# Altium PCB mosfet.PcbDoc
Units mil, origin at the board's own origin, x right, y up, seen from the top; angles counter-clockwise.
Board outline 6000 x 4000 mil, 2 copper layers (Top Layer, Bottom Layer); 35 components, 26 nets, 100 pads, 0 vias.
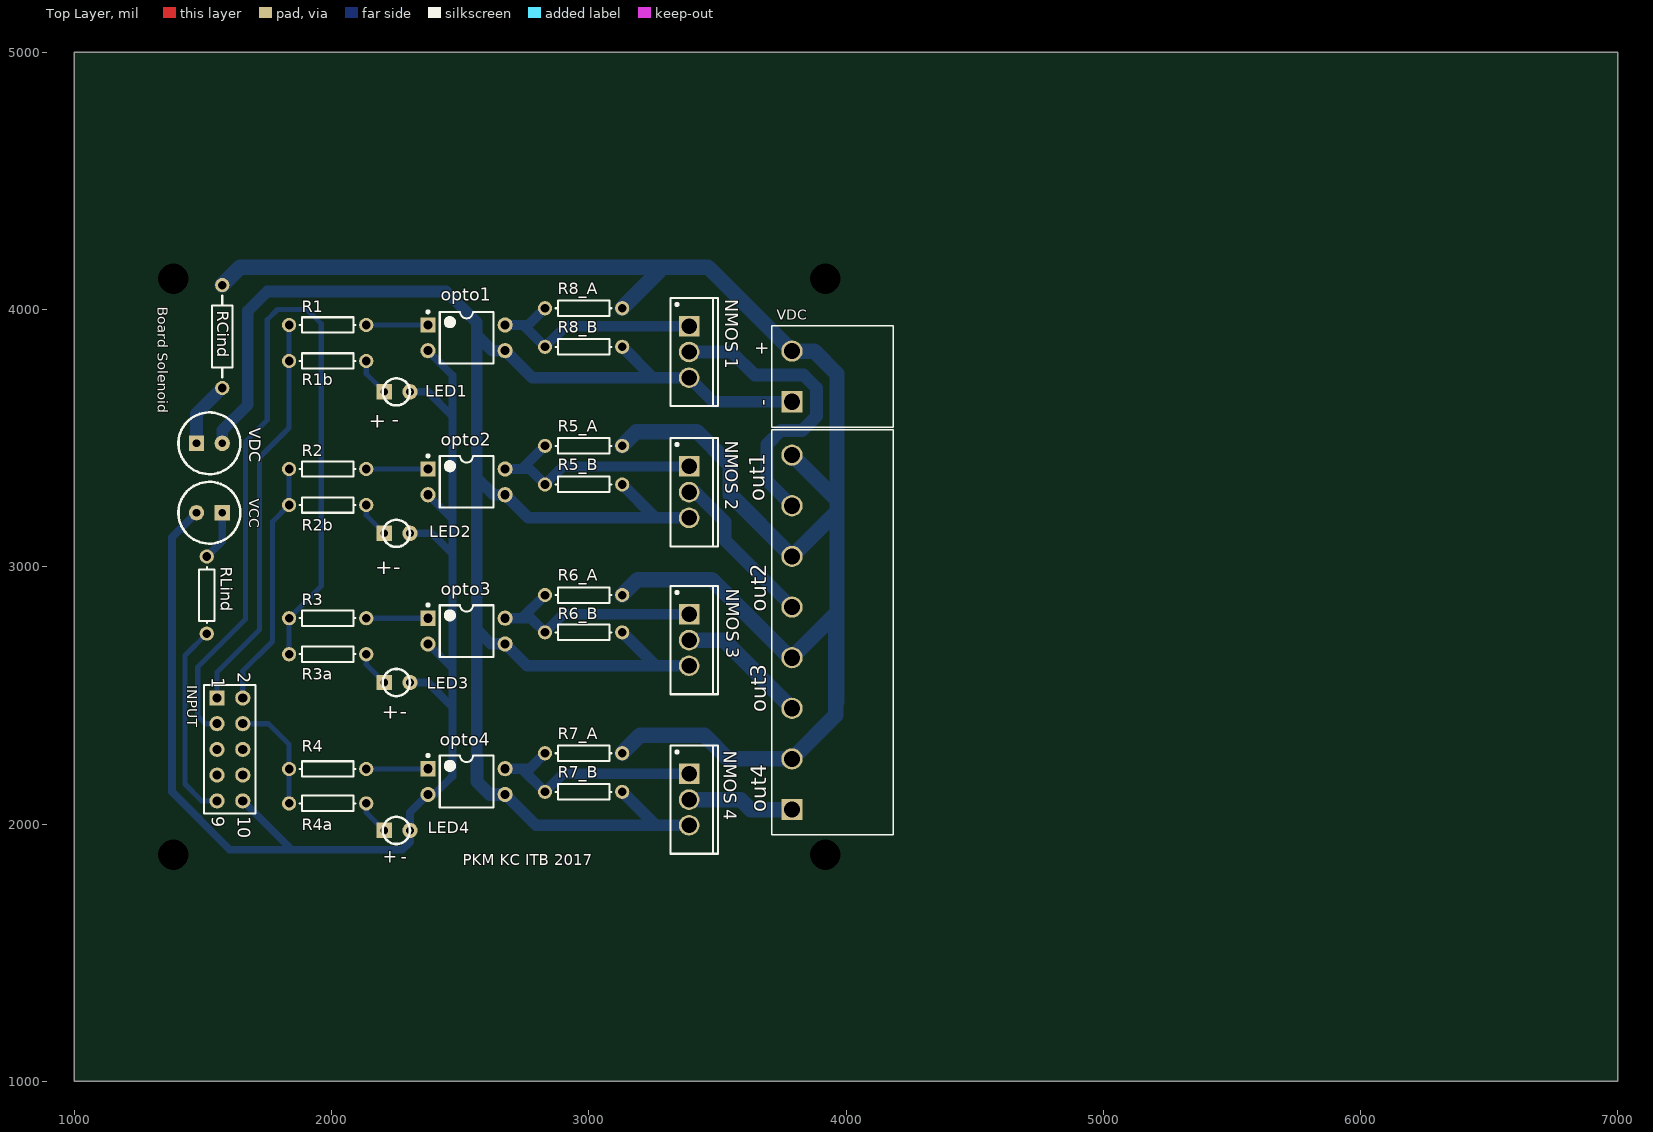
[diagram p0: Top Layer view]
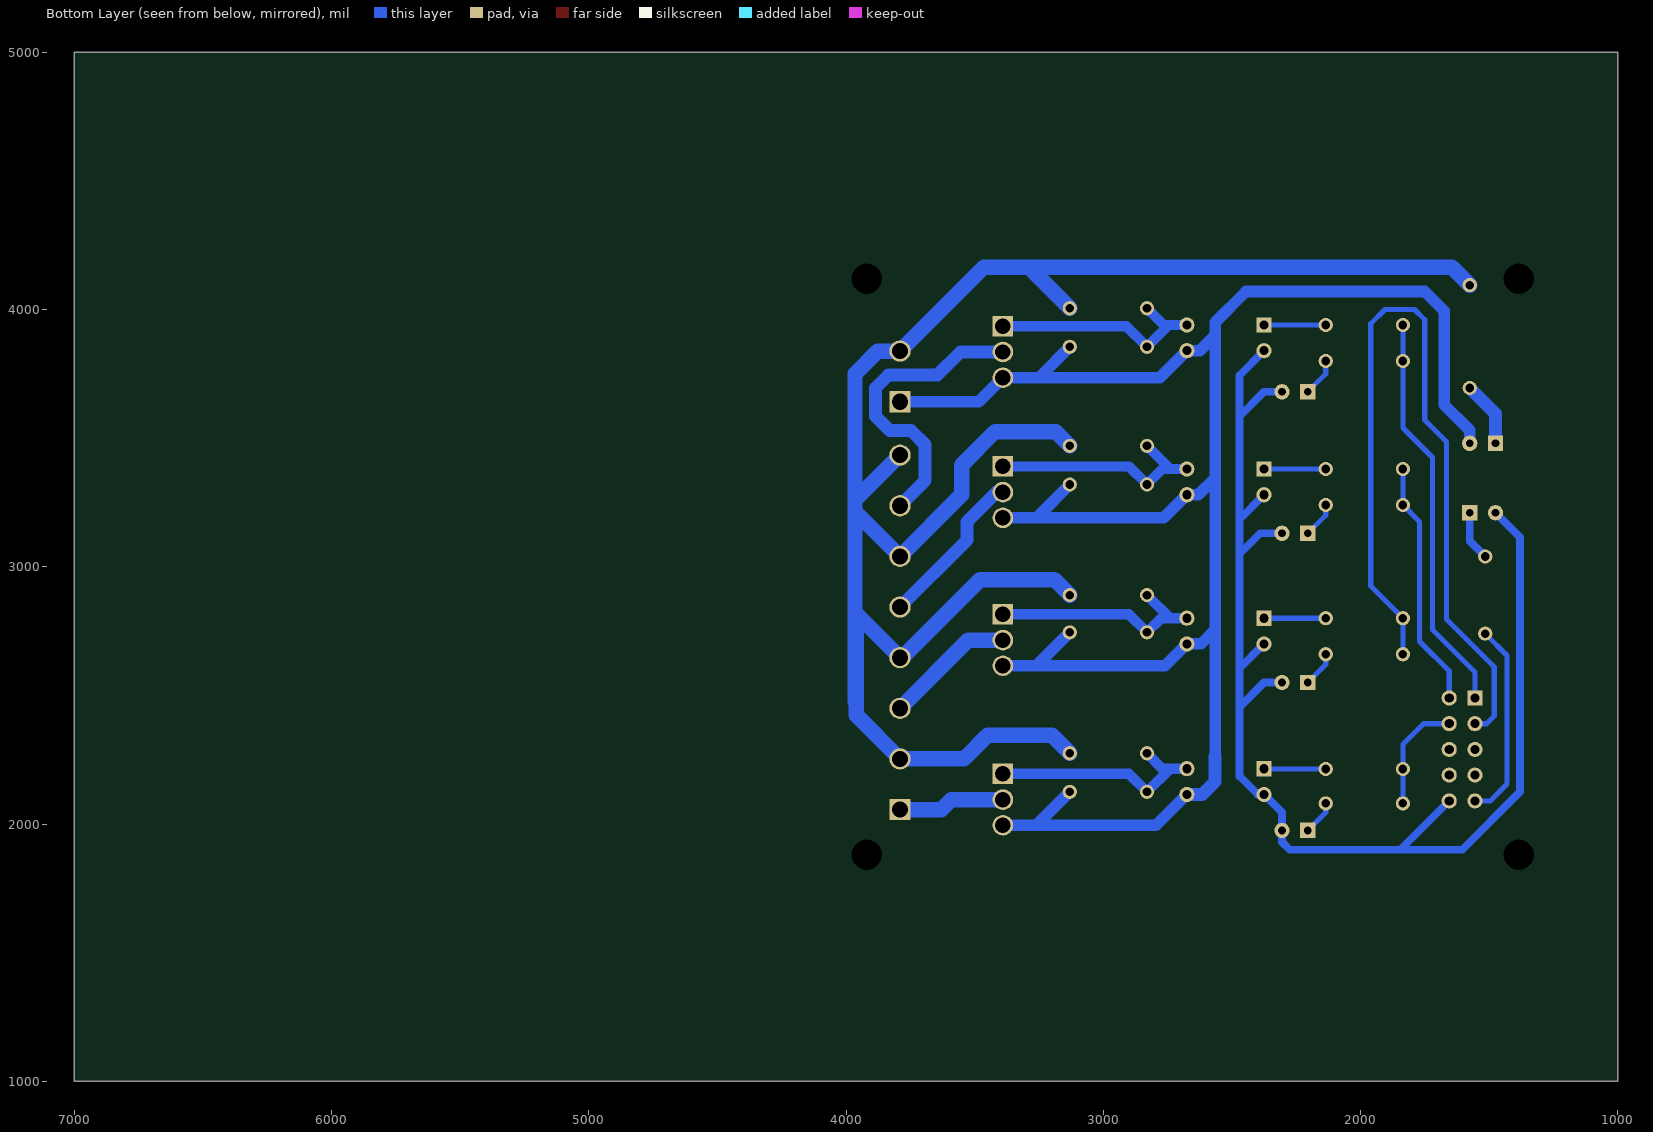
[diagram p1: Bottom Layer view, seen from below]

## Layer stack, top to bottom
Top Solder: solder mask 0.4, Solder Resist, Dk 3.5
Top Layer: signal copper 1.4
Dielectric1: dielectric 12.6, FR-4, Dk 4.8
Bottom Layer: signal copper 1.4
Bottom Solder: solder mask 0.4, Solder Resist, Dk 3.5

## Board outline
1000,1000 7000,1000 7000,5000 1000,5000

## Design rules (kind name [scope] priority, off if disabled: settings)
Clearance Clearance_3 [InNamedPolygon('ground1')] p1: gap=40
Clearance Clearance_2 [InNamedPolygon('ground2')] p2: gap=40
Clearance Clearance_1 [InNamedPolygon('ground2')] p3: gap=20
Clearance [All] p4: gap=20
PolygonConnect [All] p1: connectstyle=Relief reliefconductorwidth=10 reliefentries=4 polygonreliefangle="90 Angle" airgapwidth=10
RoomDefinition mosfet [InComponentClass('mosfet')] p1: confinementstyle=ConfineIn formatcopy=TRUE lockcomponents=FALSE outline 1285,1780 4025,1780 4025,4240 1285,4240
RoutingVias [All] p1: holewidth=28 width=50 viastyle="Through Hole" minholewidth=28 minwidth=50 maxholewidth=28 maxwidth=50
SilkToSolderMaskClearance SilkscreenOverComponentPads [IsPad] p1: minsilkscreentomaskgap=10 clearancetoexposedcopper=TRUE
SolderMaskExpansion [All] p1: expansion=4
Width [All] p1: maxlimit=100 minlimit=10 preferedwidth=10
29 further rules are at their usual default settings.

## Classes and differential pairs
component class mosfet: LED1 LED2 LED3 LED4 "NMOS 1" "NMOS 2" "NMOS 3" "NMOS 4" opto1 opto2 opto3 opto4 out1 R1 R1b R2 R2b R3 R3a R4 R4a R5_A R5_B R6_A R6_B R7_A R7_B R8_A R8_B RCind RLind VDC

## Components (designator, comment, footprint, x,y, rotation, side; value= is the part's Value field where it differs from the comment)
INPUT "Comment" HDR2X5 1555,2490 r270 top
LED1 "LED kecil" "LED kecil" 2305,3780 r0 top
LED2 "LED kecil" "LED kecil" 2305,3230 r0 top
LED3 "LED kecil" "LED kecil" 2305,2650 r0 top
LED4 "LED kecil" "LED kecil" 2305,2075 r0 top
"NMOS 1" "NMOS-2" SFM-T3/A4.7V#1 3390,3835 r270 top
"NMOS 2" "NMOS-2" SFM-T3/A4.7V#1 3390,3290 r270 top
"NMOS 3" "NMOS-2" SFM-T3/A4.7V#2 3390,2715 r270 top
"NMOS 4" "NMOS-2" SFM-T3/A4.7V#1 3390,2095 r270 top
opto1 "Optoisolator1" DIP-4 2525,3890 r0 top (schematic designator optocoupler1)
opto2 "Optoisolator1" DIP-4 2525,3330 r0 top (schematic designator optocoupler2)
opto3 "Optoisolator1" DIP-4 2525,2750 r0 top (schematic designator optocoupler3)
opto4 "Optoisolator1" DIP-4 2525,2165 r0 top (schematic designator optocoupler4)
out1 "691312710008" 691312710008 3790,2745 r90 top (schematic designator out)
R1 "Res1" AXIAL-0.3 1985,3940 r0 top
R1b "Res1" AXIAL-0.3 1985,3800 r180 top
R2 "Res1" AXIAL-0.3 1985,3380 r0 top
R2b "Res1" AXIAL-0.3 1985,3240 r180 top
R3 "Res1" AXIAL-0.3 1985,2800 r0 top
R3a "Res1" AXIAL-0.3 1985,2660 r180 top
R4 "Res1" AXIAL-0.3 1985,2213.98 r0 top
R4a "Res1" AXIAL-0.3 1985,2080 r180 top
R5_A "Res1" AXIAL-0.3 2980,3470 r0 top
R5_B "Res1" AXIAL-0.3 2980,3320 r180 top
R6_A "Res1" AXIAL-0.3 2980,2890 r0 top
R6_B "Res1" AXIAL-0.3 2980,2745 r180 top
R7_A "Res1" AXIAL-0.3 2980,2275 r0 top
R7_B "Res1" AXIAL-0.3 2980,2125 r180 top
R8_A "Res1" AXIAL-0.3 2980,4005 r0 top
R8_B "Res1" AXIAL-0.3 2980,3855 r180 top
RCind "Res2" AXIAL-0.4 1575.13,3895 r90 top
RLind "Res1" AXIAL-0.3 1515,2890 r270 top
VCC "Comment" "LED sedang" 1375,3210 r180 top
VDC "LED sedang" "LED sedang" 1675.13,3480 r0 top (schematic designator COILIND)
VDC "Terminal 2 pin" 691312710002 3790,3740 r90 top (schematic designator Vsumber)

## Footprints (in the part's own frame and the unit in brackets; to place one, negate y for a bottom-side part, rotate by r counter-clockwise, add the part's x,y. Pads: shape width x height; smd on the part's side, far side on the other; paste and mask are expansions set on the pad)
691312710002 [mm] "5.00mm - Open Horizhontal PCB Header - 02p"
  rect 2.1x2.1 hole 1.6: 1(-2.5,0)
  round 2.1 hole 1.6: 2(2.5,0)
  silkscreen extent -5,-10 5,2, body extent -5,-10 5,2, height 8.56
691312710008 [mm] "5.00mm - Open Horizhontal PCB Header - 08p"
  rect 2.1x2.1 hole 1.6: 1(-17.5,0)
  round 2.1 hole 1.6: 2(-12.5,0) 3(-7.5,0) 4(-2.5,0) 5(2.5,0) 6(7.5,0) 7(12.5,0) 8(17.5,0)
  silkscreen extent -20,-10 20,2, body extent -20,-10 20,2, height 8.56
AXIAL-0.3 [mm] "Axial Device, Thru-Hole; 2 Leads; 0.3 in Pin Spacing"
  round 1.4 hole 0.85: 1(-3.81,0) 2(3.81,0)
  silkscreen extent -2.77,-0.76 2.77,0.76
AXIAL-0.4 [mm] "Axial Device, Thru-Hole; 2 Leads; 0.4 in Pin Spacing"
  round 1.4 hole 0.85: 1(-5.08,0) 2(5.08,0)
  silkscreen extent -4.06,-1.02 4.06,1.02
DIP-4 [mm] "DIP; 4 Leads; Row Spacing 7.62 mm; Pitch 2.54 mm"
  rect 1.5x1.5 hole 0.9: 1(-3.81,1.27)
  round 1.5 hole 0.9: 2(-3.81,-1.27) 3(3.81,-1.27) 4(3.81,1.27)
  silkscreen extent -3.93,-2.55 2.65,2.69, body extent -3.15,-2.5 3.15,2.5, height 5.6
HDR2X5 [mm] "Connector; Header; 5x2 Position"
  rect 1.5x1.5 hole 0.9: 1(0,0)
  round 1.5 hole 0.9: 2(0,2.54) 3(2.54,0) 4(2.54,2.54) 5(5.08,0) 6(5.08,2.54) 7(7.62,0) 8(7.62,2.54) 9(10.16,0) 10(10.16,2.54)
  silkscreen extent -1.27,-1.27 11.43,3.81
"LED kecil" [mil]
  rect 60x60 hole 30: 1(-100,-100)
  round 60 hole 30: 2(0,-100)
  silkscreen extent -106,-153 0,-47
"LED sedang" [mil]
  rect 60x60 hole 30: 1(-200,0)
  round 60 hole 30: 2(-100,0)
  silkscreen extent -270,-120 -30,120
SFM-T3/A4.7V#1 [mil] "TO, Thru-Hole, Vertical, Heatsink Mounted; 3 In-Line Leads; Pitch 2.54 mm"
  rect 80x80 hole 60: 1(-100,0)
  round 80 hole 60: 2(0,0) 3(100,0)
  silkscreen extent -211,-73 211,112, body extent -213,-75 213,114, height 760
SFM-T3/A4.7V#2 [mil] "TO, Thru-Hole, Vertical, Heatsink Mounted; 3 In-Line Leads; Pitch 2.54 mm"
  rect 80x80 hole 60 paste+0: 1(-100,0)
  round 80 hole 60 paste+0: 2(0,0)
  round 80 hole 60: 3(100,0)
  silkscreen extent -211,-73 211,112, body extent -213,-75 213,114, height 760

## Part data
"NMOS 1" "NMOS 2" "NMOS 3" "NMOS 4": "N-Channel Power MOSFET"
opto1 opto2 opto3 opto4: "4-Pin Phototransistor Optocoupler"
out1: "WR-TBL Terminal block - serie 3127 - 5.00mm"
R1 R1b R2 R2b R3 R3a R4 R4a R5_A R5_B R6_A R6_B R7_A R7_B R8_A R8_B RCind RLind: "Resistor"
VDC: library part 691312710002, "WR-TBL Terminal block - serie 3127 - 5.00mm"

## Free pads (board coordinates)
  round 60 hole 118: 0(1385,4120) 1(3920,4120) 2(3920,1880) 3(1385,1880)

## Nets (pads, with @x,y where several pads share a name; then routed paths per layer and width w, separated by ;. In a path a pad name is that pad's centre, name@x,y a point inside that pad or via, vN(x,y) a via of type N, cw(c..) or ccw(c..) an arc to the next point about the centre after c; other vN are vias at no path point)
1: INPUT.1 R1.1 R1b.2 | length 1566
  Bottom Layer w20: INPUT.1 1555,2590 1720,2755 1720,3425 1835,3540 R1b.2 R1.1
2: INPUT.2 R2.1 R2b.2 | length 964.6
  Bottom Layer w20: INPUT.2 1655,2595 1770,2710 1770,3175 R2b.2 R2.1
3: INPUT.3 R3.1 R3a.2 | length 3330.4
  Bottom Layer w10: INPUT.3 INPUT.3@1560,2390
  Bottom Layer w20: INPUT.3 1510,2390 1480,2420 1480,2610 1665,2795 1665,3485 1750,3570 1750,3960 1790,4000 1905,4000 1960,3945 1960,2925 R3.1 R3a.2
4: INPUT.4 R4.1 R4a.2 | length 443.1
  Bottom Layer w20: INPUT.4 1755,2390 1835,2310 R4.1 R4a.2
GND: INPUT.10 LED1.2 LED2.2 LED3.2 LED4.2 opto1.2 opto2.2 opto3.2 opto4.2 VCC.2 | length 5331.6
  Bottom Layer w10: 1380,3110 1380,3115 ; 2470,3175 2470,3185
  Bottom Layer w30: 1380,3110 1380,2125 1605,1900 1845,1900 ; 1380,3115 VCC.2 ; INPUT.10 1845,1900 ; LED3.2 2375,2550 2470,2455 ; LED2.2 2390,3130 2470,3050 ; LED1.2 2375,3680 2470,3585 ; opto3.2 2470,2605 ; opto2.2 2470,3185 2470,3585 ; opto1.2 2470,3745 2470,3585 ; 2470,3175 2470,3050 ; 1845,1900 2275,1900 2305,1930 LED4.2 2305,2045 opto4.2 2400,2115 2470,2185 2470,2455 ; 2470,2455 2470,2605 ; 2470,2605 2470,3050
GND2: "NMOS 1.3" "NMOS 2.3" "NMOS 3.3" "NMOS 4.3" opto1.3 opto2.3 opto3.3 opto4.3 R5_B.1 R6_B.1 R7_B.1 R8_B.1 VDC.1@3790,3641.57 VDC.2@1575.13,3480 | length 8031
  Bottom Layer w45: VDC.2@1575.13,3480 1575.13,3530.13 1675,3630 1675,3995 1750,4070 2445,4070 2565,3950 2565,3900 ; 2565,2263.43 2565,2755 ; opto4.3 2795,1995 3260,1995 ; R7_B.1 3260,1995 ; R6_B.1 3260,2615 ; R5_B.1 3255,3195 3255,3190 ; R8_B.1 3250,3735 ; 3390,1995 3260,1995 ; 3390,2615 3260,2615 ; 3390,3190 3255,3190 ; VDC.1@3790,3641.57 3483.43,3641.57 3390,3735 3250,3735 ; 2565,2755 2565,3345 ; 2565,2755 2620,2700 opto3.3 2760,2615 3260,2615 ; 2565,3345 2565,3900 ; 2565,3345 2630,3280 opto2.3 2765,3190 3255,3190 ; 2565,3900 2625,3840 opto1.3 2780,3735 3250,3735
  Bottom Layer w50: 2565,2263.43 2565,2165 2615,2115 opto4.3
NetCOILIND_1: RCind.1 VDC.1@1475.13,3480 | length 256.4
  Bottom Layer w50: VDC.1@1475.13,3480 1475.13,3595 RCind.1
NetLED1_1: LED1.1 R1b.1 | length 149
  Bottom Layer w20: R1b.1 2135,3750 LED1.1
NetLED2_1: LED2.1 R2b.1 | length 139
  Bottom Layer w20: R2b.1 2135,3200 LED2.1
NetLED3_1: LED3.1 R3a.1 | length 139
  Bottom Layer w20: R3a.1 2135,2620 LED3.1
NetLED4_1: LED4.1 R4a.1 | length 134
  Bottom Layer w20: R4a.1 2135,2045 LED4.1
NetLOGICIND_1: RLind.1 VCC.1 | length 194.9
  Bottom Layer w30: RLind.1 1575,3100 1575,3150 VCC.1
Netoptocoupler1_1: opto1.1 R1.2 | length 240
  Bottom Layer w20: R1.2 opto1.1
Netoptocoupler2_1: opto2.1 R2.2 | length 240
  Bottom Layer w20: R2.2 opto2.1
Netoptocoupler3_1: opto3.1 R3.2 | length 240
  Bottom Layer w20: R3.2 opto3.1
Netoptocoupler4_1: opto4.1 R4.2 | length 240.4
  Bottom Layer w10: opto4.1@2373.98,2213.98 opto4.1
  Bottom Layer w20: R4.2 opto4.1@2373.98,2213.98
NMOS1: "NMOS 1.1" opto1.4 R8_A.1 R8_B.2 | length 895.3
  Bottom Layer w40: opto1.4 2745,3940 ; R8_A.1 2765,3940 2745,3940 ; 3390,3935 2910,3935 R8_B.2 2745,3940
NMOS2: "NMOS 2.1" opto2.4 R5_A.1 R5_B.2 | length 896.1
  Bottom Layer w40: opto2.4 2740,3380 ; R5_A.1 2740,3380 ; 3390,3390 2900,3390 R5_B.2 2770,3380 2740,3380
NMOS3: "NMOS 3.1" opto3.4 R6_A.1 R6_B.2 | length 894.1
  Bottom Layer w40: opto3.4 2740,2800 ; R6_A.1 2740,2800 ; 3390,2815 2900,2815 R6_B.2 2775,2800 2740,2800
NMOS4: "NMOS 4.1" opto4.4 R7_A.1 R7_B.2 | length 896.1
  Bottom Layer w40: opto4.4 2740,2215 ; R7_A.1 2770,2215 2740,2215 ; 3390,2195 2900,2195 R7_B.2 2740,2215
SV1: "NMOS 1.2" out1.7 | length 1179.5
  Bottom Layer w50: 3390,3835 3555,3835 3645,3745 3835,3745 3885,3695 3885,3585 3830,3530 3747.59,3530 3692.22,3474.62 3692.22,3334.91 out1.7
SV2: "NMOS 2.2" out1.5 | length 626.9
  Bottom Layer w50: 3390,3290 3415,3290 3530,3175 3530,3103.43 out1.5
SV3: "NMOS 3.2" out1.3 | length 509.9
  Bottom Layer w60: 3390,2715 3524.72,2715 out1.3
SV4: "NMOS 4.2" out1.1 | length 416.1
  Bottom Layer w60: 3390,2095 3590,2095 3628.97,2056.03 out1.1
VCC: INPUT.9 RLind.2 | length 772.1
  Bottom Layer w20: RLind.2 1430,2655 1430,2590 1430,2155 1495,2090 INPUT.9
VCC2: out1.2 out1.4 out1.6 out1.8 R5_A.2 R6_A.2 R7_A.2 R8_A.2 RCind.2 VDC.2@3790,3838.43 | length 7948.8
  Bottom Layer w60: RCind.2 1645.13,4165 3270,4165 ; R7_A.2 3200,2345 3450,2345 3542.12,2252.88 out1.2 3960,2422.88 3960,2470 ; R6_A.2 3190,2950 3477.99,2950 3781.42,2646.57 out1.4 3960,2816.57 3960,2470 ; R5_A.2 3185,3525 3420,3525 3550,3395 3550,3280.28 out1.6 3965,3215.28 ; R8_A.2 3270,4145 3270,4165 ; out1.8 3965,3258.97 ; 3270,4165 3463.43,4165 3790,3838.43 3876.57,3838.43 3965,3750 3965,3258.97 ; 3960,2470 3965,2475 3965,3215.28 ; 3965,3215.28 3965,3258.97
pads on no net: INPUT.5 INPUT.6 INPUT.7 INPUT.8

## Silkscreen, mask and mechanical layers (free items; w line width, h text height)
Top Overlay:
  text "Board Solenoid" at 1325,4010 h40 r270
  text "+" at 3695,3820 h50 r90
  text "-" at 3700,3625 h50 r90
  text "-" at 2235,3545 h60
  text "+" at 2145,3540 h60
  text "+" at 2170,2970 h60
  text "-" at 2240,2970 h60
  text "out2" at 3690,2825 h60 r90
  text "out3" at 3690,2435 h60 r90
  text "+" at 2195,2410 h60
  text "-" at 2265,2410 h60
  text "out4" at 3690,2045 h60 r90
  text "+" at 2200,1850 h50
  text "-" at 2270,1850 h50
  text "PKM KC ITB 2017" at 2510,1840 h42

## Text inside footprints (layer, text, board x,y; h text height)
INPUT: Top Overlay "2" at 1635,2590 h50 r270; Top Overlay "1" at 1535,2570 h50 r270; Top Overlay "9" at 1535,2030 h50 r270; Top Overlay "10" at 1635,2030 h50 r270